# EAGLE board spot_check_rev_3 (EAGLE 9.6.2)
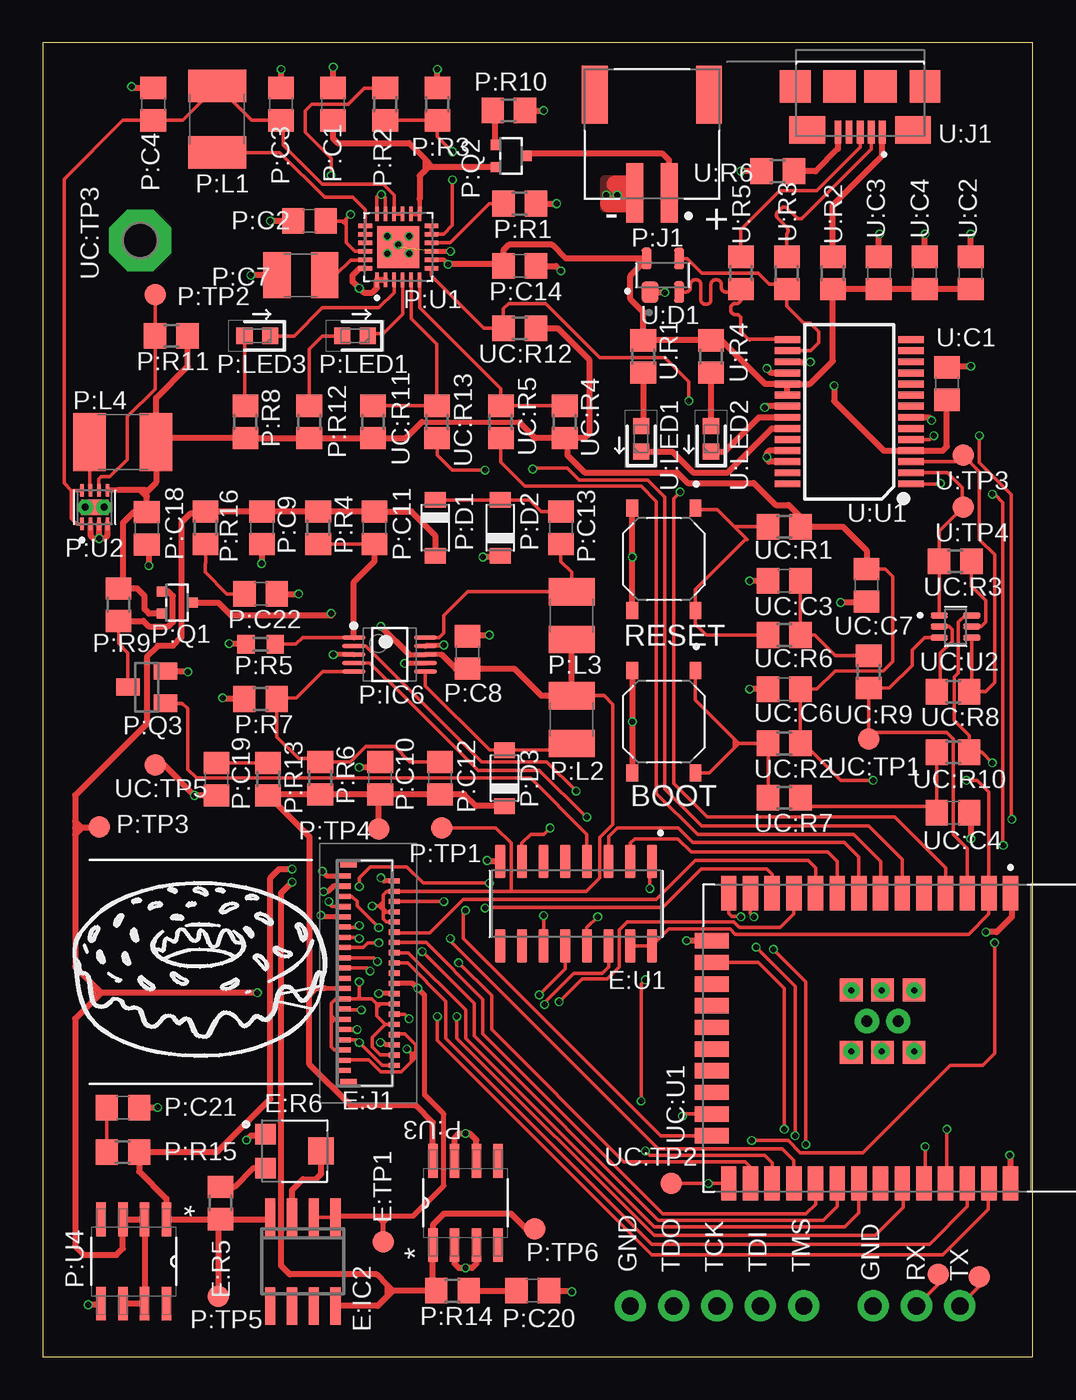
[diagram p0: board, top side]
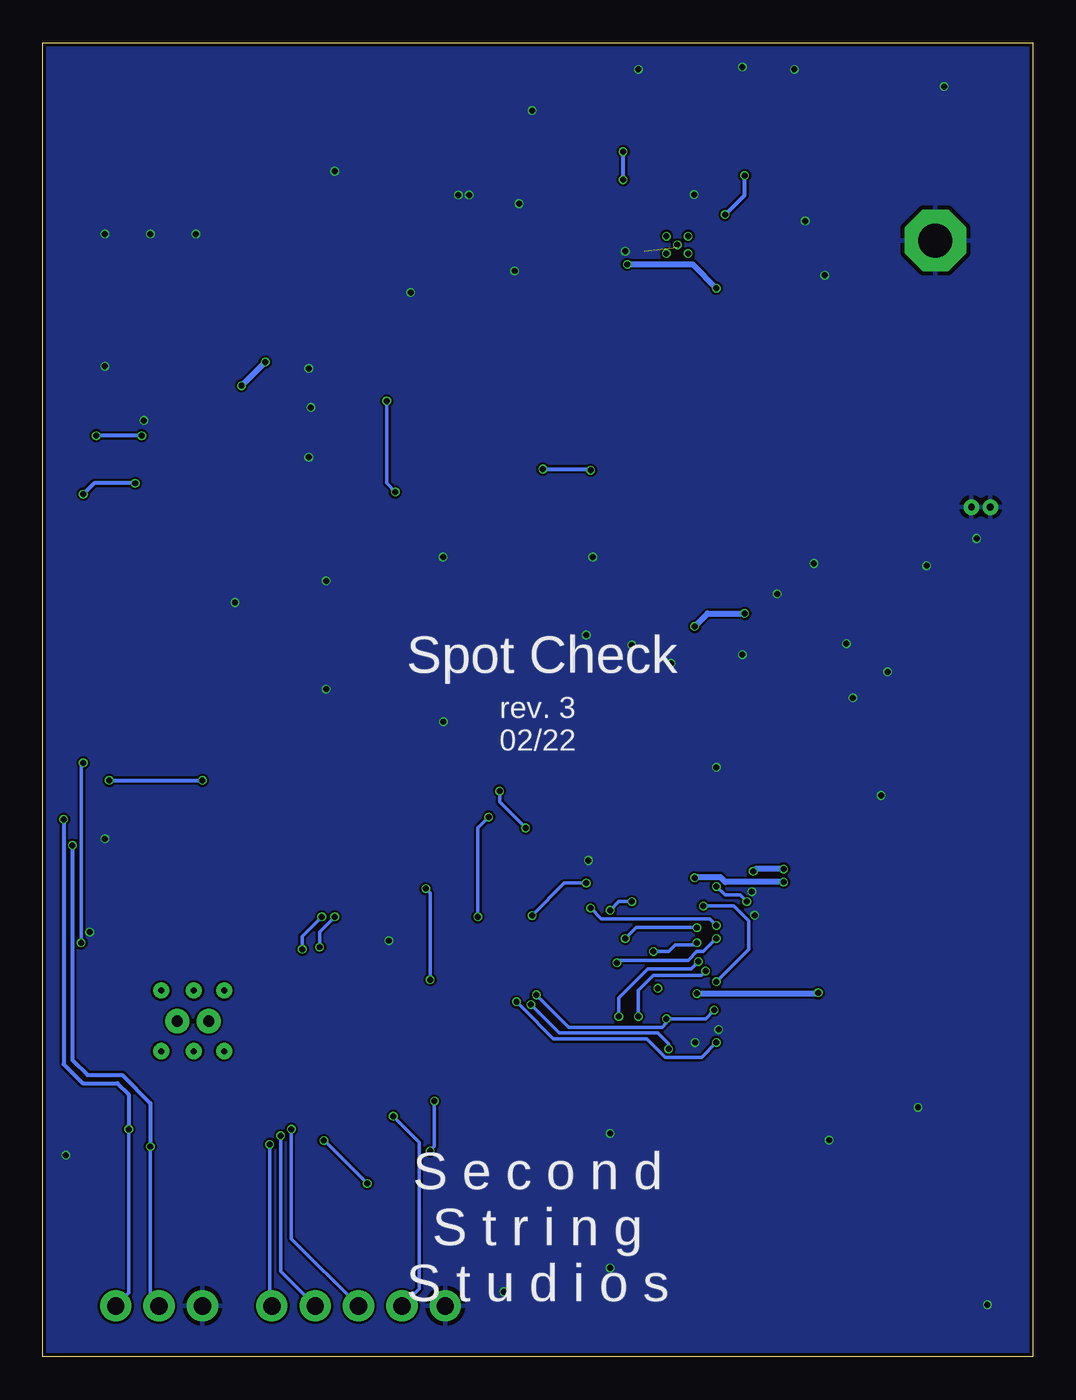
[diagram p1: board, bottom side, seen from below]

Size 58 x 77 mm. Coordinates in mm from the lower left corner, seen from the top.
Outline: 0,0 58,0 58,77 0,77 0,0
Copper layers (1*16): Top 0.035mm / dielectric 1.6mm / Bottom 0.035mm
Design rules "jlcpcb-2layers": minimum track width 5mil, minimum drill 0.3mm, track to track 5mil, track to pad 5mil, pad to pad 5mil, via to via 5mil, smd to smd 5mil, copper to edge 0.2mm, drill to drill 6mil, minimum pad ring 10mil, minimum via ring 3mil, stop-mask expansion 4mil, vias tented up to drill 0mil, thermal gap 10mil

## Footprints (pad centres in the part's own frame; a part is rotated, then mirrored left to right if it is on the bottom)
SO08 = smd 0.6 x 2.2: 1 -1.905,-2.6; 2 -0.635,-2.6; 3 0.635,-2.6; 4 1.905,-2.6; 5 1.905,2.6; 6 0.635,2.6; 7 -0.635,2.6; 8 -1.905,2.6
FH26W39S03SHW05 = smd 0.3 x 0.8: 1 -5.7,-1.288; 3 -5.1,-1.288; 5 -4.5,-1.288; 7 -3.9,-1.288; 9 -3.3,-1.288; 11 -2.7,-1.288; 13 -2.1,-1.288; 15 -1.5,-1.288; 17 -0.9,-1.288; 19 -0.3,-1.288; 21 0.3,-1.288; 23 0.9,-1.288; 25 1.5,-1.288; 27 2.1,-1.288; 29 2.7,-1.288; 31 3.3,-1.288; 33 3.9,-1.288; 35 4.5,-1.288; 37 5.1,-1.288; 39 5.7,-1.288 | smd 0.3 x 0.65: 2 -5.4,1.663; 4 -4.8,1.663; 6 -4.2,1.663; 8 -3.6,1.663; 10 -3,1.663; 12 -2.4,1.663; 14 -1.8,1.663; 16 -1.2,1.663; 18 -0.6,1.663; 20 0,1.663; 22 0.6,1.663; 24 1.2,1.663; 26 1.8,1.663; 28 2.4,1.663; 30 3,1.663; 32 3.6,1.663; 34 4.2,1.663; 36 4.8,1.663; 38 5.4,1.663 | smd 0.4 x 0.95: MP1 -6.4,-1.013; MP2 6.4,-1.013
R0805 = smd 1.3 x 1.5: 1 -0.95,0; 2 0.95,0
TRIM_TC33X-2-333E = smd 1.2 x 1.2: 1 -1.8,1; 3 -1.8,-1 | smd 1.5 x 1.6: 2 1.45,0
B1,27 = smd 1.27 x 1.27: TP 0,0
SOIC127P600X175-16N = smd 1.97 x 0.6: 1 -2.475,4.445; 2 -2.475,3.175; 3 -2.475,1.905; 4 -2.475,0.635; 5 -2.475,-0.635; 6 -2.475,-1.905; 7 -2.475,-3.175; 8 -2.475,-4.445; 9 2.475,-4.445; 10 2.475,-3.175; 11 2.475,-1.905; 12 2.475,-0.635; 13 2.475,0.635; 14 2.475,1.905; 15 2.475,3.175; 16 2.475,4.445
C0805 = smd 1.3 x 1.5: 1 -0.95,0; 2 0.95,0
C1210 = smd 1.6 x 2.7: 1 -1.4,0; 2 1.4,0
SOD3716X135N = smd 0.91 x 1.22: A 1.635,0; C -1.635,0
LINEAR_TECHNOLOGY_LT1945EMS#PBF_0 = smd 1.35 x 0.25: 1 -2.1,1; 2 -2.1,0.5; 3 -2.1,0; 4 -2.1,-0.5; 5 -2.1,-1; 6 2.1,-1; 7 2.1,-0.5; 8 2.1,0; 9 2.1,0.5; 10 2.1,1
JST_S2B-PH-SM4-TB(LF)(SN) = smd 1 x 3.5: 1 -1,0; 2 1,0 | smd 1.5 x 3.4: S1 -3.35,-5.75; S2 3.35,-5.75
L1812 = smd 1.9 x 3.4: 1 -1.95,0; 2 1.95,0
LEDC1608X80N = smd 0.95 x 0.95: 1 -0.75,0; 2 0.75,0
SOT323 = smd 0.6 x 0.55: 1 -0.65,-0.925; 2 0.65,-0.925; 3 0,0.925
SOT23 = smd 1 x 1.4: 1 -0.95,-1.1; 2 0.95,-1.1; 3 0,1.1
R0603 = smd 1 x 1.1: 1 -0.85,0; 2 0.85,0
QFN50P400X400X100-25N = smd 0.86 x 0.27: 1 -1.935,1.25; 2 -1.935,0.75; 3 -1.935,0.25; 4 -1.935,-0.25; 5 -1.935,-0.75; 6 -1.935,-1.25; 13 1.935,-1.25; 14 1.935,-0.75; 15 1.935,-0.25; 16 1.935,0.25; 17 1.935,0.75; 18 1.935,1.25 | smd 0.27 x 0.86: 7 -1.25,-1.935; 8 -0.75,-1.935; 9 -0.25,-1.935; 10 0.25,-1.935; 11 0.75,-1.935; 12 1.25,-1.935; 19 1.25,1.935; 20 0.75,1.935; 21 0.25,1.935; 22 -0.25,1.935; 23 -0.75,1.935; 24 -1.25,1.935 | smd 2.45 x 2.45: 25 0,0
SON50P200X200X80-9N = smd 0.74 x 0.28: 1 -0.985,0.75; 2 -0.985,0.25; 3 -0.985,-0.25; 4 -0.985,-0.75; 5 0.985,-0.75; 6 0.985,-0.25; 7 0.985,0.25; 8 0.985,0.75 | smd 0.9 x 1.6: 9 0,0 | drill 0.4 pad 0.61: 9_1 0,0.55; 9_2 0,-0.55
SOIC127P600X175-8N = smd 1.981 x 0.559: 1 -2.464,1.905; 2 -2.464,0.635; 3 -2.464,-0.635; 4 -2.464,-1.905; 5 2.464,-1.905; 6 2.464,-0.635; 7 2.464,0.635; 8 2.464,1.905
SOT143 = smd 0.99 x 1.26: 1 -0.75,-0.98 | smd 0.59 x 1.26: 2 0.95,-0.98; 3 0.95,0.98; 4 -0.95,0.98
AMPHENOL_10118192-0002LF = smd 0.4 x 1.35: 1 -1.3,0; 2 -0.65,0; 3 0,0; 4 0.65,0; 5 1.3,0 | smd 2.1 x 1.6: S1 -3.1,-0.125; S2 3.1,-0.125 | smd 1.8 x 1.9: S3 -3.8,-2.675; S6 3.8,-2.675 | smd 1.9 x 1.9: S4 -1.2,-2.675; S5 1.2,-2.675
SSOP28-0.65-10.2X5.2MM = smd 0.4 x 1.5: 1 -4.225,-3.625; 2 -3.575,-3.625; 3 -2.925,-3.625; 4 -2.275,-3.625; 5 -1.625,-3.625; 6 -0.975,-3.625; 7 -0.325,-3.625; 8 0.325,-3.625; 9 0.975,-3.625; 10 1.625,-3.625; 11 2.275,-3.625; 12 2.925,-3.625; 13 3.575,-3.625; 14 4.225,-3.625; 15 4.225,3.625; 16 3.575,3.625; 17 2.925,3.625; 18 2.275,3.625; 19 1.625,3.625; 20 0.975,3.625; 21 0.325,3.625; 22 -0.325,3.625; 23 -0.975,3.625; 24 -1.625,3.625; 25 -2.275,3.625; 26 -2.925,3.625; 27 -3.575,3.625; 28 -4.225,3.625
JST-XH-05-PACKAGE-ROUND-PAD = drill 1.016: 1 -5.08,0; 2 -2.54,0; 3 0,0; 4 2.54,0; 5 5.08,0
SW_PTS526_SM08_SMTR2_LFS = smd 1 x 0.7: 1 -3,1.85; 2 3,1.85; 3 -3,-1.85; 4 3,-1.85
P1-20 = drill 2.007 pad 3.15 octagon: TP 0,0
MODULE_ESP32-WROOM-32E_(16MB) = smd 2 x 0.9: 1 -8.5,5.26; 2 -8.5,3.99; 3 -8.5,2.72; 4 -8.5,1.45; 5 -8.5,0.18; 6 -8.5,-1.09; 7 -8.5,-2.36; 8 -8.5,-3.63; 9 -8.5,-4.9; 10 -8.5,-6.17; 11 -8.5,-7.44; 12 -8.5,-8.71; 13 -8.5,-9.98; 14 -8.5,-11.25; 25 8.5,-11.25; 26 8.5,-9.98; 27 8.5,-8.71; 28 8.5,-7.44; 29 8.5,-6.17; 30 8.5,-4.9; 31 8.5,-3.63; 32 8.5,-2.36; 33 8.5,-1.09; 34 8.5,0.18; 35 8.5,1.45; 36 8.5,2.72; 37 8.5,3.99; 38 8.5,5.26 | smd 0.9 x 2: 15 -5.715,-12.25; 16 -4.445,-12.25; 17 -3.175,-12.25; 18 -1.905,-12.25; 19 -0.635,-12.25; 20 0.635,-12.25; 21 1.905,-12.25; 22 3.175,-12.25; 23 4.445,-12.25; 24 5.715,-12.25 | smd 1.33 x 1.33: 39_1 -2.835,-0.405; 39_3 0.835,-0.405; 39_4 -2.835,-2.24; 39_6 0.835,-2.24; 39_7 -2.835,-4.075; 39_9 0.835,-4.075 | drill 0.65 pad 1.422: 39_13 -1,-1.323; 39_18 -1,-3.158
SOT65P210X110-6N = smd 1.02 x 0.36: 1 -0.955,0.65; 2 -0.955,0; 3 -0.955,-0.65; 4 0.955,-0.65; 5 0.955,0; 6 0.955,0.65
JST-XH-03-PACKAGE-ROUND-PAD = drill 1.016: 1 -2.54,0; 2 0,0; 3 2.54,0

## Placement (x,y rotation side)
E:IC2  LM358DR  [SO08]  15.24,5.59 180 top
E:J1  FH26W-39S-0.3SHW_05_  [FH26W39S03SHW05]  18.92,22.48 270 top
E:R5  20k  [R0805]  10.41,9.02 90 top
E:R6  10k  [TRIM_TC33X-2-333E]  14.86,12.06 0 top
E:TP1  TPB1,27  [B1,27]  19.94,6.73 0 top
E:U1  CD74HC4094M  [SOIC127P600X175-16N]  31.24,26.54 270 top
P:C1  10uF  [C0805]  17.01,73.39 90 top
P:C2  4.7uF  [C0805]  15.62,66.55 180 top
P:C3  10uF  [C0805]  13.96,73.39 90 top
P:C4  10uF  [C0805]  6.48,73.39 90 top
P:C7  6.8uF  [C1210]  15.12,63.37 180 top
P:C8  4.7uF  [C0805]  24.89,41.27 90 top
P:C9  1uF  [C0805]  12.84,48.58 270 top
P:C10  1uF  [C0805]  19.77,33.91 270 top
P:C11  100pF  [C0805]  19.44,48.58 270 top
P:C12  4.7pF  [C0805]  23.28,33.91 270 top
P:C13  0.1uF  [C0805]  30.35,48.58 90 top
P:C14  1uF  [C0805]  27.94,63.91 0 top
P:C18  22uF  [C0805]  6.1,48.55 270 top
P:C19  0.33uF  [C0805]  10.19,33.85 270 top
P:C20  0.1uF  [C0805]  28.7,3.87 0 top
P:C21  0.1uF  [C0805]  4.7,14.61 0 top
P:C22  0.33uF  [C0805]  12.77,44.7 0 top
P:D1  MBR0520LT1G  [SOD3716X135N]  22.99,48.58 270 top
P:D2  MBR0520LT1G  [SOD3716X135N]  26.8,48.58 90 top
P:D3  MBR0520LT1G  [SOD3716X135N]  27.05,33.91 90 top
P:IC6  LINEAR_TECHNOLOGY_LT1945EMS#PBFLINEAR_TECHNOLOGY_LT1945EMS#PBF_0_0  [LINEAR_TECHNOLOGY_LT1945EMS#PBF_0]  20.32,41.15 0 top
P:J1  S2B-PH-SM4-TB(LF)(SN)  [JST_S2B-PH-SM4-TB(LF)(SN)]  35.69,68.2 180 top
P:L1  2.2uH  [L1812]  10.22,72.52 90 top
P:L2  22uH  [C1210]  30.99,37.34 270 top
P:L3  22uH  [C1210]  30.99,43.43 90 top
P:L4  1uH  [L1812]  4.7,53.59 0 top
P:LED1  150060RS55040  [LEDC1608X80N]  18.29,59.82 180 top
P:LED3  150060GS55040  [LEDC1608X80N]  12.57,59.82 180 top
P:Q1  SSM3J132TU,LF  [SOT323]  7.87,44.2 270 top
P:Q2  SSM3J132TU,LF  [SOT323]  27.43,70.36 270 top
P:Q3  MMBT3904,215  [SOT23]  6.1,39.24 90 top
P:R1  470  [R0805]  27.94,67.56 180 top
P:R2  330k  [R0805]  20.06,73.39 90 top
P:R3  330k  [R0805]  23.11,73.39 270 top
P:R4  397k  [R0805]  16.14,48.58 90 top
P:R5  27.1k  [R0603]  12.76,41.75 0 top
P:R6  1M  [R0805]  16.26,33.91 90 top
P:R7  59k  [R0805]  12.76,38.54 180 top
P:R8  1k  [R0805]  11.87,54.78 270 top
P:R9  20k  [R0805]  4.45,44.07 90 top
P:R10  1k  [R0805]  27.3,73.03 180 top
P:R11  178k  [R0805]  7.53,59.82 0 top
P:R12  620  [R0805]  15.61,54.78 270 top
P:R13  22  [R0805]  13.21,33.85 270 top
P:R14  22  [R0805]  24,3.87 180 top
P:R15  22  [R0805]  4.7,12 0 top
P:R16  22  [R0805]  9.54,48.58 90 top
P:TP1  TPB1,27  [B1,27]  23.37,30.99 0 top
P:TP2  TPB1,27  [B1,27]  6.6,62.23 0 top
P:TP3  TPB1,27  [B1,27]  3.3,31.05 0 top
P:TP4  TPB1,27  [B1,27]  19.68,30.92 0 top
P:TP5  TPB1,27  [B1,27]  10.29,3.56 0 top
P:TP6  TPB1,27  [B1,27]  28.83,7.49 0 top
P:U1  BQ24196RGER  [QFN50P400X400X100-25N]  20.83,65.02 90 top
P:U2  TPS62082DSGR  [SON50P200X200X80-9N]  3.05,49.78 90 top
P:U3  MC78L15ACDR2G  [SOIC127P600X175-8N]  24.76,9.02 90 top
P:U4  MC79L15ACDR2G  [SOIC127P600X175-8N]  5.33,5.59 270 top
U:C1  100nF  [C0805]  52.96,57.02 90 top
U:C2  4.7uF  [C0805]  54.36,63.5 90 top
U:C3  10nF  [C0805]  48.97,63.5 90 top
U:C4  100nF  [C0805]  51.66,63.5 90 top
U:D1  DRTR5V0U2SR-7  [SOT143]  36.32,63.37 0 top
U:J1  10118192-0002LF  [AMPHENOL_10118192-0002LF]  47.88,71.75 180 top
U:LED1  150060YS55040  [LEDC1608X80N]  35.05,53.78 90 top
U:LED2  150060BS55040  [LEDC1608X80N]  39.15,53.78 90 top
U:R1  270  [R0805]  35.18,58.61 90 top
U:R2  0  [R0805]  46.28,63.5 270 top
U:R3  0  [R0805]  43.59,63.5 270 top
U:R4  330  [R0805]  39.15,58.61 90 top
U:R5  0  [R0805]  40.89,63.5 270 top
U:R6  0  [R0805]  43.05,69.47 180 top
U:TP1  TPB1,27  [B1,27]  52.45,4.83 0 top
U:TP2  TPB1,27  [B1,27]  54.86,4.7 0 top
U:TP3  TPB1,27  [B1,27]  53.91,52.83 0 top
U:TP4  TPB1,27  [B1,27]  53.91,49.78 0 top
U:U1  INTERFACE-FT232RL(SSOP28)  [SSOP28-0.65-10.2X5.2MM]  47.24,55.37 90 top
UC:C3  .01uF  [C0805]  43.43,45.47 180 top
UC:C4  .01uF  [C0805]  53.32,31.88 0 top
UC:C6  22uF  [C0805]  43.43,39.12 180 top
UC:C7  1uF  [C0805]  48.26,45.21 270 top
UC:JTAG  JST-XH-05-PIN-ROUND-PAD  [JST-XH-05-PACKAGE-ROUND-PAD]  39.5,2.98 180 top
UC:R1  12k  [R0805]  43.43,48.64 0 top
UC:R2  12k  [R0805]  43.43,35.94 0 top
UC:R3  10k  [R0805]  53.45,46.61 180 top
UC:R4  4.7k  [R0805]  30.58,54.78 90 top
UC:R5  0  [R0805]  26.83,54.78 270 top
UC:R6  330k  [R0805]  43.43,42.29 0 top
UC:R7  330k  [R0805]  43.43,32.77 0 top
UC:R8  10k  [R0805]  53.32,38.98 0 top
UC:R9  0  [R0805]  48.39,40.13 270 top
UC:R10  0  [R0805]  53.32,35.43 0 top
UC:R11  4.7k  [R0805]  19.35,54.78 90 top
UC:R12  4.7k  [R0805]  27.94,60.26 180 top
UC:R13  0  [R0805]  23.09,54.78 270 top
UC:S1  PTS526_SM08_SMTR2_LFS  [SW_PTS526_SM08_SMTR2_LFS]  36.39,46.74 270 top
UC:S2  PTS526_SM08_SMTR2_LFS  [SW_PTS526_SM08_SMTR2_LFS]  36.39,37.21 270 top
UC:TP1  TPB1,27  [B1,27]  48.39,36.2 0 top
UC:TP2  TPB1,27  [B1,27]  36.83,10.16 0 top
UC:TP3  TPPAD1-20  [P1-20]  5.71,65.41 0 top
UC:TP5  TPB1,27  [B1,27]  6.6,34.67 0 top
UC:U1  ESP32-WROOM-32E_(16MB)  [MODULE_ESP32-WROOM-32E_(16MB)]  51.44,18.67 270 top
UC:U2  BC848CDW1T1G  [SOT65P210X110-6N]  53.47,42.79 0 top
UC:X1  JST-XH-03-PIN-ROUND-PAD  [JST-XH-03-PACKAGE-ROUND-PAD]  51.18,2.98 180 top

## Library data of the parts
E:IC2 = linear
E:J1 = FH26W-39S-0.3SHW_05_; DESCRIPTION: FFC & FPC Connectors 39P SMT HORIZ ZIF 1MM HGHT .3MM PITCH; HEIGHT: 1mm; MANUFACTURER_NAME: Hirose; MANUFACTURER_PART_NUMBER: FH26W-39S-0.3SHW(05); MOUSER_PART_NUMBER: 798-FH26W39S03SHW05; MOUSER_PRICE-STOCK: https://www.mouser.co.uk/ProductDetail/Hirose-Connector/FH26W-39S-03SHW05?qs=vnk2wBG9e14RpudjtVAEhA%3D%3D
E:R5 P:R1-P:R16 U:R1-U:R6 UC:R1-UC:R13 = rcl; SPICEPREFIX: R
E:R6 = TRIM_TC33X-2-333E
E:TP1 P:TP1-P:TP6 U:TP1-U:TP4 UC:TP1-UC:TP3 UC:TP5 = testpad
E:U1 = CD74HC4094M; AVAILABILITY: In Stock; DESCRIPTION: High Speed CMOS Logic 8-Stage Shift-and-Store Bus Register with 3-Stage Outputs 16-SOIC -55 to 125; MF: Texas Instruments; MP: CD74HC4094M; PACKAGE: SOIC-16 Texas Instruments; PRICE: None; PURCHASE-URL: https://pricing.snapeda.com/search/part/CD74HC4094M/?ref=eda
P:C1-P:C4 P:C7-P:C14 P:C18-P:C22 U:C1-U:C4 UC:C3 UC:C4 UC:C6 UC:C7 = rcl; SPICEPREFIX: C
P:D1-P:D3 = MBR0520LT1G; AVAILABILITY: In Stock; DESCRIPTION: Diode Schottky 20V 500mA Surface Mount SOD-123; MF: ON Semiconductor; MP: MBR0520LT1G; PACKAGE: SOD-123-2 ON Semiconductor; PRICE: None; PURCHASE-URL: https://pricing.snapeda.com/search/part/MBR0520LT1G/?ref=eda
P:IC6 = LT1945EMS#PBF; CIIVA_IDS: 1482624; COMPONENT_LINK_1_DESCRIPTION: Manufacturer URL; COMPONENT_LINK_1_URL: http://www.linear.com/; COMPONENT_LINK_3_DESCRIPTION: Package Specification; COMPONENT_LINK_3_URL: http://cds.linear.com/docs/en/packaging/05081661_F_MS.pdf; DATASHEET: http://cds.linear.com/docs/en/datasheet/1945fa.pdf; DATASHEET_VERSION: Rev. A; FOOTPRINT_VARIANT_NAME_0: Level C; FOOTPRINT_VARIANT_NAME_1: Level B; FOOTPRINT_VARIANT_NAME_2: Level A; IMPORTED: yes; IMPORTED_FROM: vault; IMPORT_TS: 1521842479; MF: Linear Technology; MOUNTING_TECHNOLOGY: Surface Mount; MPN: LT1945EMS#PBF; NUMBER_OF_OUTPUTS: 2; PACKAGE: MS-10; PACKAGE_DESCRIPTION: 10-Pin Plastic MSOP, Body 3 x 3 mm, Pitch 0.5 mm; PACKAGE_VERSION: Rev. E, 06/2010; PREFIX: U; RELEASE_DATE: 1377814922; ROHS: Yes; VAULT_GUID: B0F6C986-74D1-4265-A3D3-2E2E10FD489A; VAULT_REVISION: 624277BD-F6E2-44C2-9180-A8188AE27574; VIN_MAXV: 15; VIN_MINV: 1.2
P:J1 = JST-S2B-PH-SM4-TB_LF__SN_; AVAILABILITY: In Stock; DESCRIPTION: Connector Header Surface Mount, Right Angle 2 position 0.079 (2.00mm); MF: JST Sales; MP: S2B-PH-SM4-TB(LF)(SN); PACKAGE: None; PRICE: None
P:L1 P:L4 = rcl; SPICEPREFIX: L
P:L2 P:L3 = custom_rcl
P:LED1 P:LED3 U:LED1 U:LED2 = 150060VS75000; AVAILABILITY: In Stock; DESCRIPTION: Green 570nm LED Indication - Discrete 2V 0603 (1608 Metric); MF: Wurth Elektronik; MP: 150060VS75000; PACKAGE: None; PRICE: None
P:Q1 P:Q2 = SSM3J132TU
P:Q3 = transistor-npn
P:U1 = BQ24196RGER; AVAILABILITY: In Stock; DESCRIPTION: I2C controlled 2.5A single cell USB/Adaptor charger w/ Narrow VDC Power Path 24-VQFN -40 to 85; MF: Texas Instruments; MP: BQ24196RGER; PACKAGE: VQFN-24 Texas Instruments; PRICE: None; PURCHASE-URL: https://pricing.snapeda.com/search/part/BQ24196RGER/?ref=eda
P:U2 = TPS62082DSGR; AVAILABILITY: In Stock; DESCRIPTION: 1.2A High Efficient Step Down Converter in 2x2mm SON Package. 3.3 Vout (Min) 8-WSON -40 to 125; MF: Texas Instruments; MP: TPS62082DSGR; PACKAGE: WSON-8 Texas Instruments; PRICE: None; PURCHASE-URL: https://pricing.snapeda.com/search/part/TPS62082DSGR/?ref=eda
P:U3 = MC78L15ACDR2G; AVAILABILITY: In Stock; DESCRIPTION: Linear Voltage Regulator IC Positive Fixed 1 Output 100mA 8-SOIC; MF: ON Semiconductor; MP: MC78L15ACDR2G; PACKAGE: SOIC-8 ON Semiconductor; PRICE: None; PURCHASE-URL: https://pricing.snapeda.com/search/part/MC78L15ACDR2G/?ref=eda
P:U4 = MC78L15ACDR2G
U:D1 = DRTR5V0U2SR-7; AVAILABILITY: In Stock; DESCRIPTION: ESD Suppressor Diode Diode Array Uni-Dir 5.5V Automotive 4-Pin SOT-143B T/R; MF: NXP Semiconductors; MP: PRTR5V0U2X; PACKAGE: TO-253-4 NXP Semiconductors; PRICE: None; PURCHASE-URL: https://pricing.snapeda.com/search/part/PRTR5V0U2X/?ref=eda
U:J1 = MICRO-USB-10118192-0002LF; AVAILABILITY: In Stock; DESCRIPTION: Micro USB 2.0, Input Output Connectors, B TYPE RECEPTACLE without flange; MF: Amphenol ICC (FCI); MP: 10118192-0002LF; PACKAGE: None; PRICE: None; PURCHASE-URL: https://pricing.snapeda.com/search/part/10118192-0002LF/?ref=eda
U:U1 = FT232RL_SSOP28_; AVAILABILITY: In Stock; DESCRIPTION: USB Bridge, USB to UART USB 2.0 UART Interface 28-SSOP; MF: FTDI, Future; MP: FT232RL; PACKAGE: SSOP-28 FTDI, Future; PRICE: None; PURCHASE-URL: https://pricing.snapeda.com/search/part/FT232RL/?ref=eda
UC:JTAG UC:X1 = Rembrandt Electronics - JST XH Connectors v1-0
UC:S1 UC:S2 = PTS526_SM08_SMTR2_LFS; AVAILABILITY: In Stock; DESCRIPTION: Tactile Switch SPST-NO Top Actuated Surface Mount; MF: C&K; MP: PTS526 SM08 SMTR2 LFS; PACKAGE: None; PRICE: None; PURCHASE-URL: https://pricing.snapeda.com/search/part/PTS526 SM08 SMTR2 LFS/?ref=eda
UC:U1 = ESP32-WROOM-32E__16MB_; AVAILABILITY: Not in stock; DESCRIPTION: Bluetooth, WiFi 802.11b/g/n, Bluetooth v4.2 +EDR, Class 1, 2 and 3 Transceiver Module 2.4GHz ~ 2.5GHz Integrated, Trace Surface Mount; MF: Espressif Systems; MP: ESP32-WROOM-32E (16MB); PACKAGE: Module Espressif Systems; PRICE: None
UC:U2 = BC848CDW1T1G; AVAILABILITY: In Stock; DESCRIPTION: Bipolar (BJT) Transistor Array 2 NPN (Dual) 30V 100mA 100MHz 380mW Surface Mount SC-88/SC70-6/SOT-363; MF: ON Semiconductor; MP: BC848CDW1T1G; PACKAGE: SC-88-6 ON Semiconductor; PRICE: None; PURCHASE-URL: https://pricing.snapeda.com/search/part/BC848CDW1T1G/?ref=eda

## Nets
3V3_CTRL: E:U1.4 P:Q3.1
3V3_CTRLD: E:J1.4 E:J1.8 E:J1.10 E:J1.25 E:J1.26 E:J1.29 E:J1.30 E:J1.35 E:J1.36 P:C8.1 P:IC6.8 P:L2.1 P:L3.1 P:Q1.3 P:TP1.TP
3V3_REG: E:U1.15 E:U1.16 P:C18.1 P:L4.2 P:Q1.2 P:R8.2 P:R9.2 P:R11.2 P:R12.2 P:U2.5 UC:C6.1 UC:C7.1 UC:R1.2 UC:R2.2 UC:R4.1 UC:R11.1 UC:R12.1 UC:U1.2
5V_USB: P:C14.1 P:U1.1 P:U1.2 P:U1.8 P:U1.24 U:C2.1 U:C3.1 U:C4.1 U:D1.4 U:R1.2 U:R2.2 U:R4.2 U:U1.19 U:U1.20
15V: E:IC2.8 E:J1.2 P:R14.2 P:TP6.TP P:U3.1
22V: E:J1.23 P:C10.2 P:C12.2 P:D3.C P:R6.1 P:R13.2 P:TP4.TP P:U3.8
22V_CTRL: E:U1.13 P:IC6.4
-15V: E:IC2.4 E:J1.1 E:R5.1 P:R15.2 P:TP5.TP P:U4.1
-20V: E:J1.24 P:C9.1 P:C11.1 P:D1.A P:R4.2 P:R16.2 P:TP3.TP P:U4.2 P:U4.3 P:U4.6 P:U4.7
-20V_CTRL: E:U1.7 P:IC6.2
BQ_INT: P:U1.7 UC:R12.2 UC:U1.4
BQ_SCL: P:U1.5 UC:R11.2 UC:R13.1
BQ_SDA: P:U1.6 UC:R4.2 UC:R5.1
DISP_CE: E:J1.6 UC:U1.24
DISP_CLK: E:J1.5 UC:U1.28
DISP_CLKV: E:J1.33 E:J1.38 UC:U1.11
DISP_D0: E:J1.12 UC:U1.10
DISP_D1: E:J1.13 UC:U1.26
DISP_D2: E:J1.14 UC:U1.29
DISP_D3: E:J1.15 UC:U1.30
DISP_D4: E:J1.16 UC:U1.31
DISP_D5: E:J1.17 UC:U1.33
DISP_D6: E:J1.18 UC:U1.36
DISP_D7: E:J1.19 UC:U1.37
DISP_SPH: E:J1.11 UC:U1.12
DTR: U:TP4.TP U:U1.2 UC:R3.2 UC:U2.1
E:15V_CTRL: E:U1.5
E:-15V_CTRL: E:U1.6
E:DISP_GMODE: E:J1.27 E:J1.28 E:U1.12
E:DISP_OE: E:J1.7 E:U1.11
E:DISP_SPV: E:J1.32 E:J1.37 E:U1.14
E:DISP_VCOMMON: E:IC2.1 E:IC2.2 E:J1.22 E:TP1.TP
E:N$2: E:R5.2 E:R6.3
E:N$3: E:IC2.3 E:R6.2
ESP_RX: U:TP1.TP U:U1.1 UC:U1.34 UC:X1.2
ESP_TX: U:TP2.TP U:U1.5 UC:U1.35 UC:X1.1
GND: E:J1.3 E:J1.9 E:J1.31 E:J1.34 E:R6.1 E:U1.8 P:C1.2 P:C2.2 P:C3.2 P:C4.2 P:C7.2 P:C8.2 P:C9.2 P:C10.1 P:C14.2 P:C18.2 P:C19.2 P:C20.2 P:C21.2 P:C22.2 P:D2.C P:IC6.3 P:IC6.7 P:IC6.9 P:J1.2 P:Q3.2 P:R1.1 P:R3.1 P:R5.1 P:R7.2 P:R10.1 P:U1.9 P:U1.17 P:U1.18 P:U1.25 P:U2.2 P:U2.3 P:U2.4 P:U2.9 P:U2.9_1 P:U2.9_2 P:U3.2 P:U3.3 P:U3.6 P:U3.7 P:U4.5 U:C1.2 U:C2.2 U:C3.2 U:C4.2 U:D1.1 U:R6.2 U:U1.7 U:U1.18 U:U1.21 U:U1.25 U:U1.26 UC:C3.2 UC:C4.2 UC:C6.2 UC:C7.2 UC:JTAG.5 UC:S1.3 UC:S1.4 UC:S2.3 UC:S2.4 UC:TP3.TP UC:TP5.TP UC:U1.1 UC:U1.15 UC:U1.38 UC:X1.3
P:3V3_PG: P:R11.1 P:TP2.TP P:U2.6
P:BQ_PG: P:LED3.1 P:U1.3
P:BQ_REGN: P:C2.1 P:R2.2 P:U1.22
P:BQ_STAT: P:LED1.1 P:U1.4
P:N$1: P:C1.1 P:Q2.2 P:U1.13 P:U1.14
P:N$2: P:R2.1 P:R3.2 P:U1.11 P:U1.12
P:N$3: P:L1.1 P:U1.19 P:U1.20 P:U1.21
P:N$4: P:J1.1 P:Q2.3
P:N$5: P:C7.1 P:U1.23
P:N$6: P:R1.2 P:U1.10
P:N$7: P:LED3.2 P:R8.1
P:N$8: P:C3.1 P:C4.1 P:L1.2 P:U1.15 P:U1.16 P:U2.1 P:U2.8
P:N$9: P:Q2.1 P:R10.2
P:N$10: P:C12.1 P:IC6.5 P:R6.2 P:R7.1
P:N$11: P:L4.1 P:U2.7
P:N$12: P:LED1.2 P:R12.1
P:N$13: P:D3.A P:IC6.6 P:L2.2
P:N$14: P:C13.2 P:D1.C P:D2.A
P:N$15: P:Q1.1 P:Q3.3 P:R9.1
P:N$16: P:C13.1 P:IC6.10 P:L3.2
P:N$17: P:C11.2 P:IC6.1 P:R4.1 P:R5.2
P:N$19: P:C22.1 P:R16.1
P:N$20: P:C21.1 P:R15.1
P:N$21: P:C20.1 P:R14.1
P:N$22: P:C19.1 P:R13.1
RTS: U:TP3.TP U:U1.3 UC:R8.2 UC:U2.4
SHR_CLK: E:U1.3 UC:U1.8
SHR_DATA: E:U1.2 UC:U1.9
SHR_STR: E:U1.1 UC:U1.27
U:FT232_RX_IND: U:LED2.1 U:U1.22
U:FT232_TX_IND: U:LED1.1 U:U1.23
U:N$1: U:LED1.2 U:R1.1
U:N$2: U:LED2.2 U:R4.1
U:N$3: U:J1.1 U:R2.1
U:N$4: U:C1.1 U:U1.4 U:U1.17
U:N$7: U:J1.5 U:R6.1
U:USBD1_N: U:J1.2 U:R3.1
U:USBD1_P: U:J1.3 U:R5.1
U:USBD2_N: U:D1.3 U:R3.2 U:U1.16
U:USBD2_P: U:D1.2 U:R5.2 U:U1.15
UC:ESP_EN: UC:R9.2 UC:TP1.TP UC:U1.3 UC:U2.3
UC:ESP_IO0: UC:R10.2 UC:TP2.TP UC:U1.25 UC:U2.6
UC:ESP_TCK: UC:JTAG.3 UC:U1.16
UC:ESP_TDI: UC:JTAG.2 UC:U1.14
UC:ESP_TDO: UC:JTAG.4 UC:U1.23
UC:ESP_TMS: UC:JTAG.1 UC:U1.13
UC:N$1: UC:R3.1 UC:U2.5
UC:N$2: UC:R13.2 UC:U1.6
UC:N$3: UC:R5.2 UC:U1.7
UC:N$4: UC:R8.1 UC:U2.2
UC:N$5: UC:R1.1 UC:R6.1 UC:S1.1 UC:S1.2
UC:N$6: UC:R2.1 UC:R7.1 UC:S2.1 UC:S2.2
UC:N$7: UC:C4.1 UC:R7.2 UC:R10.1
UC:N$9: UC:C3.1 UC:R6.2 UC:R9.1

## Tracks (layer width: path | path; a pad name or v marks a point on that pad's centre or on a via)
3V3_CTRL
  Top 0.203: E:U1.4 31.88,30.61 28.57,33.91 9.02,33.91 8.51,34.42 8.51,37.97 8.19,38.29 P:Q3.1
3V3_CTRLD  (via drill 0.35)
  Top 0.203: P:L2.1 32.89,38.74 33.4,38.23 33.4,31.2 32.62,30.42 32.62,28.05 31.85,27.28 27.43,27.28 | 27.43,27.28 E:J1.4 20.17,27.28 19.94,27.05 19.94,26.67 | E:J1.36 19.79,17.68 19.3,18.16 19.3,18.72 20.07,19.48 | E:J1.30 20.07,19.48 | 18.67,20.98 19.28,20.98 19.58,20.68 | 18.67,20.98 18.41,20.98 | 18.41,20.98 E:J1.25 17.61,20.95 17.14,20.95 16.89,20.7 16.89,20 | 17.11,19.78 16.89,19.56 | 17.11,19.78 E:J1.29 | 16.89,20 17.11,19.78 | E:J1.10 20.11,25.48 19.94,25.65 19.94,25.91 | 19.94,25.91 19.94,26.04 | 19.94,26.04 19.94,26.29 | 19.94,26.29 19.94,26.42 | 19.94,26.42 19.94,26.67 | P:TP1.TP 26.54,30.99 27.43,30.1 27.43,27.28 | E:J1.8 20.15,26.08 | 20.11,26.08 19.98,26.08 19.94,26.04 | 20.15,26.08 20.07,26.16 | 20.07,26.16 19.94,26.29 | 20.15,26.08 20.11,26.08 | 20.11,26.08 19.94,25.91 | 16.89,19.56 16.89,20 | E:J1.35 17.07,17.98 16.89,18.16 16.89,19.56 | 18.67,20.98 18.54,21.11 | 18.54,21.11 v18.54,21.97 | v19.3,26.42 19.68,26.42 | 19.68,26.42 19.94,26.42 | 19.68,26.42 19.94,26.67 | 20.07,26.16 19.94,26.16 19.68,26.42 | 18.41,20.98 18.54,21.11 | E:J1.26 19.79,20.68 | 19.79,20.68 19.58,20.68 | 20.07,19.48 19.56,19.99 19.56,20.45 | 19.79,20.68 19.56,20.45 | 19.56,20.45 19.56,20.66 19.58,20.68
  Top 0.305: 21.46,41.15 P:IC6.8 23.37,41.15
  Top 0.36: v16.89,43.56 17.02,43.56 16.89,43.43 11.05,43.43 10.29,44.2 P:Q1.3 | v19.81,42.8 21.46,41.15 | 23.37,41.15 24.19,40.33 P:C8.1 27.62,40.33 29.21,38.74 P:L2.1 P:L3.1
  Bottom 0.203: v19.3,26.42 17.53,26.42 16.64,25.53 16.64,23.88 v18.54,21.97
  Bottom 0.36: v16.89,43.56 19.05,43.56 v19.81,42.8
3V3_REG  (via drill 0.35)
  Top 0.203: UC:C7.1 49.34,46.16 49.78,45.72 49.78,40.74 49.24,40.19 46.41,40.19 45.34,39.12 UC:C6.1 44.38,36.01 44.45,35.94 | v54.1,33.78 54.74,33.78 55.42,33.09 UC:U1.2 55.42,25.96 54.23,24.77 40.58,24.77 40.28,25.06 36.68,25.06 E:U1.16 E:U1.15 | v48.64,33.78 46.74,33.78 44.58,35.94 44.45,35.94 | 44.45,35.94 UC:R2.2
  Top 0.305: 22.21,54.77 27.9,54.77 27.94,54.74 | 4.45,50.8 3.83,50.8 P:U2.5
  Top 0.36: 22.21,54.77 21.26,53.83 UC:R11.1 P:R12.2 P:R8.2 6.88,53.83 P:L4.2 | P:L4.2 6.65,56.18 8.51,58.04 8.51,59.79 P:R11.2 | P:Q1.2 6.24,43.55 5.97,43.81 5.97,44.58 5.53,45.02 P:R9.2 4.7,45.27 4.7,48.87 5.33,49.5 P:C18.1 6.1,50.42 | UC:R12.1 30.16,60.26 32,58.42 32,54.1 31.73,53.83 UC:R4.1 | UC:R4.1 28.85,53.83 27.94,54.74 | UC:R4.1 30.73,53.67 30.73,52.83 31.75,51.82 37.16,51.82 37.77,51.2 41.63,51.2 42.93,49.91 43.69,49.91 44.58,49.02 44.58,48.64 | UC:R1.2 44.58,48.64 | 44.58,48.64 46.86,48.64 48.26,47.24 UC:C7.1 | P:L4.2 6.65,51.23 6.22,50.8 | 6.1,50.42 6.1,50.67 | 6.22,50.8 6.1,50.67 | 6.1,50.67 5.97,50.8 | 5.97,50.8 5.71,50.8 | 5.71,50.8 4.45,50.8 | 5.97,50.8 6.22,50.8 | 6.1,50.42 5.71,50.8
  Bottom 0.23: v54.1,33.78 v48.64,33.78
5V_USB  (via drill 0.35)
  Top 0.254: P:U1.8 23.48,64.27 v23.75,64.01
  Top 0.36: 35.01,63.93 35.07,63.99 35.07,64.05 U:D1.4 34.8,64.35 | 35.01,63.93 34.42,63.34 34.42,61.98 35.18,61.21 U:R1.2 U:R4.2 39.75,59.56 42.32,57 U:U1.19 | U:C2.1 U:C4.1 U:C3.1 U:R2.2 46.28,58.34 44.93,57 U:U1.19 | U:U1.20 U:U1.19 | v23.75,64.01 26.89,64.01 P:C14.1 26.99,64.84 27.3,65.15 29.84,65.15 30.64,64.35 34.8,64.35 | P:U1.24 18.56,63.77 18.16,63.37 18.16,62.99 v18.54,62.61 18.8,62.36 19.3,62.36 19.58,62.63 P:U1.1 P:U1.2 | 34.8,64.35 35.01,64.14 35.01,63.93
  Bottom 0.36: v23.75,64.01 19.94,64.01 v18.54,62.61
15V  (via drill 0.35)
  Top 0.305: E:J1.2 20,27.88 v19.81,28.07 | 20.19,3.56 20.19,4.19
  Top 0.36: 20.51,3.87 P:R14.2 22.86,4.07 P:U3.1 22.86,7.75 23.5,8.38 27.43,8.38 28.32,7.49 P:TP6.TP | E:IC2.8 19.62,2.99 20.19,3.56 20.51,3.87 | 20.51,3.87 20.19,4.19 19.56,4.83 14.48,4.83 13.97,5.33 13.97,27.18 v14.61,27.81
  Bottom 0.36: v14.61,27.81 18.01,27.81 18.31,28.12 19.76,28.12 v19.81,28.07
22V
  Top 0.254: 16.51,21.59 E:J1.23
  Top 0.36: P:C10.2 P:C12.2 24.7,32.96 25.38,32.27 P:D3.C | P:C10.2 P:R6.1 13.27,32.96 P:R13.2 15.62,30.49 15.62,21.84 | 15.62,21.84 15.62,21.21 | 16.51,21.59 16,21.59 | P:U3.8 22.86,13.72 21.84,14.73 18.03,14.73 15.62,17.14 15.62,21.21 | 15.62,21.21 16,21.59 | 16,21.59 15.88,21.59 15.62,21.84 | P:TP4.TP 19.68,32.88 P:C10.2
22V_CTRL  (via drill 0.35)
  Top 0.203: P:IC6.4 19.17,40.65 20.19,39.62 20.24,39.62 25.5,34.37 29.09,34.37 31.84,31.62 v31.88,31.62 | E:U1.13 31.88,25.15 v32.51,25.78
  Bottom 0.203: v31.88,31.62 32.51,30.99 v32.51,25.78
-15V  (via drill 0.35)
  Top 0.305: E:J1.1 16.65,28.18 v16.38,28.45
  Top 0.36: E:R5.1 7.25,8.07 P:U4.1 7.24,9.27 5.65,10.86 P:R15.2 10.22,12 13.34,15.11 13.34,28.07 13.84,28.57 v14.61,28.57 | E:R5.1 13.21,8.07 E:IC2.4 | E:R5.1 10.29,7.94 P:TP5.TP
  Bottom 0.36: v14.61,28.57 16.26,28.57 v16.38,28.45
-20V  (via drill 0.35)
  Top 0.305: v19.68,21.29 E:J1.24
  Top 0.36: P:D1.A 22.99,48.13 21.59,49.53 P:C11.1 P:R4.2 P:C9.1 P:R16.2 9.42,49.4 8.64,49.4 8.13,48.9 8.13,42.16 7.62,41.66 6.73,41.66 6.1,41.02 6.1,37.08 1.91,32.89 1.91,31.37 | P:U4.6 P:U4.7 P:U4.2 P:U4.3 4.7,6.35 4.32,5.97 2.41,5.97 1.91,6.48 1.91,19.81 2.98,20.89 | 1.91,31.37 1.91,30.99 | 1.91,30.99 1.91,30.61 | 1.91,30.61 1.91,22.86 3.05,21.72 | 3.05,21.72 3.43,21.34 | v12.57,21.34 3.43,21.34 | 3.43,21.34 2.98,20.89 | P:TP3.TP 3.24,30.99 2.29,30.99 | 1.91,30.99 2.29,30.99 | 2.29,30.99 1.91,31.37 | 2.29,30.99 1.91,30.61 | 2.98,20.89 2.98,21.65 3.05,21.72 | v19.68,21.29
  Bottom 0.36: v12.57,21.34 12.62,21.29 v19.68,21.29
-20V_CTRL  (via drill 0.35)
  Top 0.203: v31.24,33.15 29.53,34.86 25.71,34.86 18.92,41.65 P:IC6.2 | v29.72,30.99 29.34,30.61 28.57,30.61 28.07,30.1 E:U1.7
  Bottom 0.203: v31.24,33.15 31.24,32.51 v29.72,30.99
BQ_INT  (via drill 0.35)
  Top 0.203: P:U1.7 22.76,63.34 25.84,60.26 UC:R12.2 26.99,61.41 27.3,61.72 29.46,61.72 32.64,58.55 36.45,58.55 37.85,57.15 v37.85,56.01 | v37.34,50.67 36.96,50.29 36.96,33.59 38.92,31.62 49.91,31.62 52.88,28.65 UC:U1.4
  Bottom 0.203: v37.85,56.01 37.85,51.18 v37.34,50.67
BQ_SCL
  Top 0.203: P:U1.5 21.58,60.84 23.09,59.33 UC:R13.1 UC:R11.2
BQ_SDA
  Top 0.203: P:U1.6 22.08,61.49 26.83,56.73 26.83,55.88 | 26.83,55.88 UC:R5.1 | UC:R4.2 26.99,55.73 26.83,55.88
DISP_CE  (via drill 0.35)
  Top 0.203: UC:U1.24 36.2,12.95 24.64,24.51 24.64,26.04 v24.77,26.16 | v23.5,26.67 E:J1.6
  Bottom 0.203: v23.5,26.67 24.26,26.67 v24.77,26.16
DISP_CLK  (via drill 0.35)
  Top 0.203: v19.68,25.15 18.41,26.42 18.41,26.67 18.11,26.98 E:J1.5 | v23.88,24.51 23.88,24.38 36.07,12.19 43.31,12.19 43.99,11.5 UC:U1.28
  Bottom 0.203: v23.88,24.51 23.24,25.15 v19.68,25.15
DISP_CLKV  (via drill 0.35)
  Top 0.203: E:J1.38 19.88,17.08 v18.54,18.41 18.38,18.58 E:J1.33 | v30.25,20.81 31.59,22.15 33.07,22.15 33.78,22.86 33.78,25.02 34.24,25.47 40.49,25.47 40.77,25.19 40.81,25.19 40.82,25.17 43.21,25.17 43.99,25.96 UC:U1.11
  Bottom 0.203: v30.25,20.81 29.88,20.44 28.09,18.64 22.62,18.64 21.54,17.55 19.4,17.55 v18.54,18.41
DISP_D0
  Top 0.203: E:J1.12 20.64,24.83 22.67,24.83 24.64,26.8 35.94,26.8 38.23,29.08 44.83,29.08 45.27,28.65 UC:U1.10
DISP_D1  (via drill 0.35)
  Top 0.203: UC:U1.26 41.45,11.12 41.15,11.43 34.04,11.43 26.29,19.18 26.29,21.16 v24.36,23.09 | E:J1.13 18.47,24.58 v18.54,24.51
  Bottom 0.203: v18.54,24.51 19.3,23.75 19.68,23.75 20.19,23.24 24.21,23.24 v24.36,23.09
DISP_D2
  Top 0.203: E:J1.14 22.46,24.28 25.78,20.95 25.78,18.92 36.32,8.38 44.7,8.38 45.27,8.94 UC:U1.29
DISP_D3  (via drill 0.35)
  Top 0.203: v22.23,23.75 25.27,20.7 25.27,18.8 36.07,8 45.72,8 46.53,8.82 UC:U1.30 | v19.68,24.26 19.05,24.26 18.77,23.98 E:J1.15
  Bottom 0.203: v19.68,24.26 19.81,24.13 20.95,24.13 21.34,23.75 v22.23,23.75
DISP_D4
  Top 0.203: E:J1.16 21.41,23.68 24.77,20.32 24.77,18.67 35.81,7.62 46.99,7.62 47.8,8.44 UC:U1.31
DISP_D5  (via drill 0.35)
  Top 0.203: E:J1.17 19.38,23.38 v19.6,23.16 | v24.26,19.94 24.26,18.67 35.81,7.11 48.77,7.11 50.09,8.43 50.29,8.64 50.42,8.76 50.42,10.1 UC:U1.33
  Bottom 0.203: v19.6,23.16 20.02,22.73 22.56,22.73 24.26,21.04 v24.26,19.94
DISP_D6
  Top 0.203: E:J1.18 21.37,23.08 23.62,20.83 23.62,18.67 35.69,6.6 51.94,6.6 54.16,8.82 UC:U1.36
DISP_D7  (via drill 0.35)
  Top 0.203: E:J1.19 19,22.78 v19.18,22.61 | v23.11,19.94 23.11,18.54 35.69,5.97 52.7,5.97 55.37,8.64 55.37,10.12 UC:U1.37
  Bottom 0.203: v19.18,22.61 19.43,22.35 22.23,22.35 23.11,21.46 v23.11,19.94
DISP_SPH  (via drill 0.35)
  Top 0.203: UC:U1.12 42.73,28.27 42.42,28.57 38.57,28.57 36.33,26.34 25.96,26.34 v25.91,26.29 | E:J1.11 17.67,25.15 18.41,25.15 v18.54,25.27
  Bottom 0.203: v25.91,26.29 25.27,25.65 18.92,25.65 v18.54,25.27
DTR
  Top 0.203: U:U1.2 52.98,51.8 53.85,50.93 53.85,49.85 U:TP4.TP 52.5,48.37 UC:R3.2 52.51,46.6 UC:U2.1
E:DISP_GMODE  (via drill 0.35)
  Top 0.203: E:U1.12 30.61,22.73 v29.08,21.21 | E:J1.28 21.2,20.08 v21.46,19.81 | v18.67,20.32 17.69,20.32 E:J1.27
  Bottom 0.203: v29.08,21.21 27.18,19.3 21.72,19.3 21.46,19.56 v21.46,19.81 19.18,19.81 v18.67,20.32
E:DISP_OE  (via drill 0.35)
  Top 0.203: v26.16,27.76 22.28,27.76 21.34,28.7 19.18,28.7 18.54,28.07 v18.54,27.56 | v16.76,26.67 16.76,26.54 16.93,26.38 E:J1.7 | E:U1.11 v29.34,25.86
  Bottom 0.203: v29.34,25.86 27.44,27.76 v26.16,27.76 | v18.54,27.56 18.03,27.05 17.14,27.05 v16.76,26.67
E:DISP_SPV  (via drill 0.35)
  Top 0.203: E:J1.37 17.66,17.4 19.09,17.4 19.79,16.7 21.01,16.7 21.58,17.28 | E:J1.32 20.63,18.92 21.21,18.92 21.84,18.29 21.84,17.91 | 21.58,17.28 21.84,17.54 | 21.84,17.91 21.84,17.54 | E:U1.14 33.15,22.86 32.77,22.48 31.11,22.48 29.4,20.77 v29.4,20.64 | v21.34,18.03 21.59,17.78 | 21.59,17.78 21.83,17.54 21.84,17.54 | 21.59,17.78 21.72,17.78 21.84,17.91 | 21.58,17.28 21.58,17.77 21.59,17.78
  Bottom 0.203: v29.4,20.64 27.74,18.97 21.97,18.97 21.34,18.34 v21.34,18.03
E:DISP_VCOMMON  (via drill 0.35)
  Top 0.203: E:IC2.2 E:IC2.1
  Top 0.305: E:J1.22 21.68,21.88 v21.97,21.59 22.35,21.21 22.35,15.37 23.5,14.22 23.5,10.03 21.72,8.26 20.32,8.26 | E:IC2.1 17.21,8.26 19.56,8.26 | 19.56,8.26 19.94,8.26 | 19.94,8.26 20.32,8.26 | E:TP1.TP 19.94,7.87 | 19.94,8.26 19.94,7.87 | 19.56,8.26 19.94,7.87 | 19.94,7.87 20.32,8.26
E:N$2
  Top 0.36: E:R5.2 11.24,9.97 12.34,11.06 E:R6.3
E:N$3
  Top 0.36: E:IC2.3 | E:IC2.3 14.61,9.78 15.24,10.41 16,10.41 16.31,10.72 E:R6.2
ESP_RX  (via drill 0.35)
  Top 0.203: U:U1.1 52.54,51.15 v52.58,51.18 | v55.63,50.55 55.75,50.55 56.24,50.06 56.24,30 v56.26,29.97 | v51.69,12.32 51.69,10.24 UC:U1.34 | U:TP1.TP 52.45,4.25 UC:X1.2
  Bottom 0.203: v51.69,12.32 51.69,3.49 UC:X1.2
  Bottom 0.23: v52.58,51.18 54.99,51.18 v55.63,50.55 | v56.26,29.97 56.26,17.4 55.37,16.51 53.34,16.51 51.69,14.86 v51.69,12.32
ESP_TX  (via drill 0.35)
  Top 0.203: U:U1.5 51.97,53.75 v52.2,53.98 | v54.86,53.98 54.86,52.38 56.72,50.53 56.72,31.54 v56.77,31.5 | v52.96,13.34 52.96,10.24 UC:U1.35 | UC:X1.1 54.86,4.13 U:TP2.TP
  Bottom 0.203: v52.96,13.34 52.96,3.75 UC:X1.1
  Bottom 0.23: v52.2,53.98 v54.86,53.98 | v52.96,13.34 52.96,15.37 53.62,16.03 55.65,16.03 56.77,17.15 v56.77,31.5
GND  (via drill 0.35)  (1 unrouted)
  Top 0.203: P:C7.2 | P:U1.17 20.07,66.97 20.07,67.94 19.88,68.14 | 19.88,68.14 19.81,68.2 19.58,67.97 P:U1.18 | 19.88,68.14 v19.84,68.1
  Top 0.305: E:J1.34 20.07,18.28 19.94,18.42 v19.78,18.42 | E:J1.31 v18.41,19.18 | E:J1.9 16.39,25.78 v16.3,25.87 | E:J1.3 17.04,27.58 16.71,27.25 v16.46,27.25 | P:IC6.3 v17.02,41.15 | P:IC6.9 22.48,41.71 v23.5,41.71 | P:IC6.7 22.4,40.63 v21.2,40.63 | P:U1.9 v23.87,64.77 v23.88,64.78
  Top 0.36: P:C14.2 30.07,63.91 v30.35,63.63 | U:D1.1 36.41,62.39 v36.45,62.36 | U:U1.21 42.36,55.7 v42.29,55.63 | U:U1.18 42.68,57.65 v42.42,57.91 | U:U1.7 51.89,55.05 v52.07,54.86 | U:C2.2 v54.36,65.79 | U:C4.2 51.66,65.76 v51.69,65.79 | U:C3.2 48.97,65.73 v49.02,65.79 | U:C1.2 53.02,58.04 v54.36,58.04 | UC:C7.2 48.19,44.2 v46.74,44.2 | UC:C4.2 54.36,31.8 v54.36,30.35 | UC:U1.1 56.77,27.09 56.77,25.78 55.88,24.89 v55.24,24.89 | UC:U1.38 56.7,11.76 v56.64,11.81 | P:C20.2 30.92,3.87 v30.99,3.81 | P:U3.2 | P:U3.2 24.13,5.46 24.38,5.21 v24.77,5.21 25.15,5.21 25.4,5.46 P:U3.3 | P:U3.3 | P:U3.7 24.13,12.83 24.38,13.08 v24.77,13.08 25.02,13.08 25.4,12.7 P:U3.6 | E:R6.1 12.95,12.95 12.19,12.95 v11.94,12.7 | P:U4.5 3.35,3.05 v2.67,3.05 | P:C21.2 v6.73,14.61 | P:C10.1 19.45,34.54 v18.54,34.54 | P:C19.2 v8.89,32.89 7.11,34.67 UC:TP5.TP | P:Q3.2 8.45,40.19 v8.51,40.13 | P:R7.2 10.6,38.54 v10.54,38.61 | P:R5.1 10.95,41.75 v10.92,41.78 | P:C22.2 v14.99,44.7 | P:C8.2 24.96,42.29 v26.16,42.29 | P:D2.C 26.72,46.86 v25.78,46.86 | P:C18.2 6.22,47.48 v6.22,46.35 | P:U2.2 2.8,48.14 2.79,48.13 2.98,47.94 v3.3,47.94 | v3.3,47.94 3.62,47.94 3.8,48.12 P:U2.4 | P:U2.3 v3.3,47.95 v3.3,47.94 | P:C9.2 12.84,46.5 v12.83,46.48 | UC:S2.3 v34.53,37.21 UC:S2.4 | UC:S1.4 v34.53,46.85 v34.54,46.86 34.54,49.73 UC:S1.3 | UC:C3.2 v41.4,45.47 | U:U1.26 42.55,52.45 42.42,52.58 v42.42,52.7 42.42,52.96 42.56,53.1 U:U1.25 | P:R10.1 v29.34,73.03 | P:R3.1 v23.11,75.44 | v23.11,75.44 | P:C1.2 v17.01,75.56 v17.02,75.56 | P:C3.2 v13.96,75.43 v13.97,75.44 | P:C4.2 5.29,74.34 v5.21,74.42 | P:C2.2 v13.34,66.55 | P:C7.2 v12.19,63.37 | UC:U1.15 v37.72,24.38 | E:U1.8 26.1,29.02 v26.04,29.08
  Top 0.36: U:R6.2 v40.89,69.47 | P:R1.1 v30.1,67.56 | UC:C6.2 v41.4,39.12 | P:U2.9 P:U2.9_2
  Top 0.508: P:J1.2 34.56,68.07
  Top 1.016: P:J1.2 34.04,68.2 33.53,68.71 34.18,68.71 P:J1.2 | P:J1.2 34.05,67.56 33.15,67.56
  other vias: 33.02,68.07 33.66,68.07
  pour Bottom: 0.25,0 57.91,0 58.04,0.13 58.04,76.96 0,76.96 0,0
  pour Top: 32.89,68.96 34.67,68.96 34.67,67.31 32.89,67.31
N$1  (via drill 0.35)
  other vias: 20.19,65.66
N$2  (via drill 0.35)
  other vias: 21.46,65.66
N$3  (via drill 0.35)
  other vias: 21.46,64.64
N$4  (via drill 0.35)
  other vias: 20.19,64.64
N$5  (via drill 0.35)
  other vias: 20.83,65.15
N$6  (via drill 0.35 pad 0.95)
  other vias: 47.37,21.46
N$7  (via drill 0.35 pad 0.95)
  other vias: 51.05,21.46
N$8  (via drill 0.35 pad 0.95)
  other vias: 49.15,21.46
N$9  (via drill 0.35 pad 0.95)
  other vias: 49.15,17.91
N$10  (via drill 0.35 pad 0.95)
  other vias: 51.05,17.91
N$11  (via drill 0.35 pad 0.95)
  other vias: 47.37,17.91
P:3V3_PG
  Top 0.203: P:U2.6 3.3,51.43 3.43,51.56 3.94,51.56 4.95,52.57 4.95,55.08 6.58,56.71 P:R11.1 6.58,62.21 P:TP2.TP
P:BQ_PG
  Top 0.203: P:U1.3 20.58,62.36 19.68,61.47 16.51,61.47 16.38,61.47 14.73,59.82 P:LED3.1
P:BQ_REGN  (via drill 0.35)
  Top 0.203: P:U1.22 18.29,64.77 17.78,65.28 17.78,66.29 | 17.53,66.55 17.78,66.29 | P:C2.1 17.53,66.55 | 17.53,66.55 17.65,66.55 17.78,66.67 | 17.78,66.67 v18.03,66.93 | P:R2.2 18.84,74.34 17.91,73.41 15.75,73.41 15.37,73.03 15.37,71.75 16.89,70.23 v16.89,69.22 | 17.78,66.29 17.78,66.67
  Bottom 0.23: v18.03,66.93 16.89,68.07 v16.89,69.22
P:BQ_STAT
  Top 0.203: P:LED1.1 19.16,59.94 19.94,59.94 21.08,61.08 P:U1.4
P:N$1
  Top 0.203: 22.35,69.47 22.35,70.1 22.41,70.16
  Top 0.254: 22.08,67.84 P:U1.13 P:U1.14
  Top 0.36: P:Q2.2 22.86,69.71 | 22.86,69.71 22.59,69.71 22.35,69.47 22.08,69.19 22.08,67.84 | P:C1.1 17.01,71.38 17.27,71.12 21.45,71.12 22.41,70.16 22.86,69.71
P:N$2  (via drill 0.35)
  Top 0.203: P:R2.1 P:R3.2 23.11,71.5 v24,70.61 | v24,68.96 24,66.29 23.48,65.77 P:U1.11 P:U1.12
  Bottom 0.23: v24,68.96 v24,70.61
P:N$3
  Top 0.203: P:L1.1 13.89,70.57 16.51,67.94 18.16,67.94 18.89,67.21 P:U1.19 P:U1.20 P:U1.21
P:N$4
  Top 0.36: P:J1.1 36.69,70.12 36.32,70.48 28.48,70.48 P:Q2.3
P:N$5
  Top 0.203: P:U1.23 18.03,64.26 17.14,63.37 P:C7.1
P:N$6
  Top 0.203: P:U1.10 23.87,65.27 26.16,67.56 P:R1.2
P:N$7
  Top 0.203: P:LED3.2 11.82,55.77 P:R8.1
P:N$8
  Top 0.203: P:U1.15 P:U1.16 20.58,68.07 19.94,68.71 16.38,68.71 14.1,70.99 14.1,72.31 P:C3.1 12.24,72.44 P:L1.2 8.2,72.44 P:C4.1 4.7,72.44 1.27,69.01 1.27,51.18 1.68,50.77 | P:U2.8 1.68,50.77 | 1.68,50.77 1.68,49.12 2,48.8 P:U2.1
P:N$9
  Top 0.36: P:Q2.1 26.51,72.87 P:R10.2
P:N$10
  Top 0.203: P:IC6.5 16.4,40.15 14.86,38.61 13.77,38.61 P:R7.1 13.71,36.33 14.99,35.05 16.19,35.05 16.38,34.86 | P:R6.2 16.38,34.86 | 16.38,34.86 18.03,34.86 18.92,35.75 20.62,35.75 21.51,34.86 P:C12.1
P:N$11
  Top 0.203: P:L4.1 2.75,50.82 P:U2.7
P:N$12
  Top 0.203: P:R12.1 15.61,59.04 16.38,59.82 P:LED1.2
P:N$13
  Top 0.203: P:D3.A 27.18,35.54 | 27.18,35.54 30.59,35.54 P:L2.2 | P:IC6.6 22.42,39.3 26.18,35.54 27.18,35.54
P:N$14
  Top 0.203: P:C13.2 29.21,49.53 28.53,50.21 P:D2.A P:D1.C
P:N$15
  Top 0.203: P:R9.1 4.45,41.78 5,41.23 P:Q3.3
  Top 0.36: P:R9.1 5.9,43.12 6.22,42.8 7.37,42.8 7.62,43.05 7.62,44.58 7.35,44.85 P:Q1.1
P:N$16
  Top 0.203: P:IC6.10 23.23,42.15 23.5,42.42 23.5,43.43 24.89,44.83 P:L3.2 30.99,45.97 30.35,46.61 P:C13.1 | P:C13.1
P:N$17
  Top 0.203: P:IC6.1 15.22,42.15 14.83,41.75 P:R5.2 | P:R4.1 P:C11.2
  Top 0.36: P:IC6.1 18.22,45.4 19.44,46.62 P:C11.2
P:N$19
  Top 0.203: P:R16.1 9.54,46.5 9.53,46.48 9.53,45.97 10.79,44.7 P:C22.1
P:N$20
  Top 0.203: P:R15.1 P:C21.1
P:N$21
  Top 0.36: P:R14.1 P:C20.1
P:N$22
  Top 0.203: P:C19.1 P:R13.1
RTS
  Top 0.203: U:U1.3 53.84,52.45 53.91,52.51 U:TP3.TP 54.86,51.88 54.86,47.89 55.75,47 55.75,39.5 55.23,38.98 UC:R8.2 54.42,39.13 UC:U2.4
SHR_CLK
  Top 0.203: UC:U1.8 47.8,29.28 46.95,30.14 38.09,30.14 37.23,30.99 33.66,30.99 33.15,30.48 E:U1.3
SHR_DATA
  Top 0.203: UC:U1.9 46.53,29.03 45.97,29.59 37.97,29.59 37.21,30.35 34.67,30.35 34.42,30.1 E:U1.2
SHR_STR  (via drill 0.35)
  Top 0.203: v35.56,27.43 35.56,28.89 E:U1.1 | UC:U1.27 42.73,11.38 42.29,11.81 35.56,11.81 v35.31,12.06 | v35.05,14.99 35.05,21.84 v35.31,22.1
  Bottom 0.203: v35.31,12.06 35.05,12.32 v35.05,14.99 | v35.31,22.1 35.31,27.18 v35.56,27.43
U:FT232_RX_IND
  Top 0.36: U:LED2.1 39.95,53.03 41.97,55.05 U:U1.22
U:FT232_TX_IND
  Top 0.36: U:LED1.1 36.88,53.03 38.1,51.82 40.13,51.82 42.71,54.4 U:U1.23
U:N$1
  Top 0.36: U:R1.1 35.18,54.66 U:LED1.2
U:N$2
  Top 0.36: U:LED2.2 U:R4.1
U:N$3
  Top 0.36: U:R2.1 46.28,67.49 49.18,70.39 U:J1.1
U:N$4  (via drill 0.35)
  Top 0.36: U:U1.17 v44.96,58.29 | v46.35,56.9 46.35,56.01 49.27,53.1 U:U1.4 52.72,53.1 52.96,53.34 U:C1.1
  Bottom 0.36: v44.96,58.29 v46.35,56.9
U:N$7
  Top 0.36: U:J1.5 46.58,70.78 45.27,69.47 U:R6.1
U:USBD1_N
  Top 0.203: U:J1.2 48.53,70.75 44.52,66.75 arc-90 44.16,66.75 43.62,67.29 arc90 43.25,67.29 43.05,67.08 arc90 43.05,66.72 43.59,66.18 arc-90 43.59,65.81 U:R3.1
U:USBD1_P
  Top 0.203: U:J1.3 47.88,70.87 45.34,68.33 43.18,68.33 40.89,66.04 U:R5.1
U:USBD2_N
  Top 0.203: U:U1.16 44.98,58.95 45.47,59.44 45.47,60.07 44.96,60.58 44.58,60.58 43.59,61.57 U:R3.2 43.27,62.87 42.55,62.87 41.91,63.5 38.61,63.5 37.76,64.35 U:D1.3
U:USBD2_P
  Top 0.203: 41.34,59.63 40.89,60.07 40.89,60.81 arc90 40.63,61.07 40.56,61.07 arc-90 40.3,61.33 40.3,61.45 arc-90 40.56,61.72 40.63,61.72 arc90 40.89,61.98 U:R5.2 40.74,62.39 40.01,62.39 arc-90 39.74,62.65 39.74,62.84 arc90 39.48,63.1 39.4,63.1 arc90 39.14,62.84 39.14,61.94 arc-90 38.88,61.68 38.8,61.68 arc-90 38.54,61.94 38.54,62.84 arc90 38.28,63.1 38.2,63.1 arc90 37.94,62.84 37.94,62.65 arc-90 37.68,62.39 U:D1.2 | 41.4,59.56 41.34,59.63 | 41.34,59.63 43.59,59.63 U:U1.15
UC:ESP_EN
  Top 0.203: UC:U2.3 51.67,42.14 50.93,41.4 50.93,40.51 49.6,39.18 UC:R9.2 UC:TP1.TP 48.77,36.58 52.96,36.58 53.34,36.2 53.34,30.61 54.16,29.79 54.16,28.9 UC:U1.3
UC:ESP_IO0  (via drill 0.35)
  Top 0.203: UC:U2.6 54.02,43.44 53.62,43.04 53.62,40.07 53.38,39.83 53.38,37.3 54.27,36.4 UC:R10.2 54.99,35.43 v55.63,34.8 | UC:TP2.TP v38.99,10.16 40.18,10.16 UC:U1.25 | v55.75,24.26 55.75,17.78 55.05,17.08 53.15,17.08 48.03,11.97 44.38,11.97 43.67,12.67 v41.53,12.67
  Bottom 0.203: v55.75,24.26 55.75,34.67 v55.63,34.8 | v38.99,10.16 41.5,12.67 v41.53,12.67
UC:ESP_TCK  (via drill 0.35)
  Top 0.203: UC:U1.16 41.91,23.11 43.43,21.59 v43.43,13.34
  Bottom 0.203: v43.43,13.34 43.43,6.92 UC:JTAG.3
UC:ESP_TDI  (via drill 0.35)
  Top 0.203: v41.78,24 44.07,21.72 v44.07,12.95 | UC:U1.14 40.19,25.98 40.36,25.8 40.87,25.8 v40.89,25.78
  Bottom 0.203: v41.78,24 41.78,24.89 v40.89,25.78 | UC:JTAG.2 44.07,5.02 v44.07,12.95
UC:ESP_TDO  (via drill 0.35)
  Top 0.203: v37.47,14.1 37.59,14.22 UC:U1.23
  Bottom 0.203: UC:JTAG.4 35.94,4 35.94,12.57 v37.47,14.1
UC:ESP_TMS  (via drill 0.35)
  Top 0.203: v42.8,23.88 44.7,21.97 v44.7,12.45 | v41.66,25.78 41.45,25.98 UC:U1.13
  Bottom 0.203: v42.8,23.88 42.8,24.64 v41.66,25.78 | v44.7,12.45 44.7,3.11 UC:JTAG.1
UC:N$1
  Top 0.203: UC:R3.1 54.4,45.17 55.24,44.32 55.24,43.05 54.98,42.79 UC:U2.5
UC:N$2  (via drill 0.35)
  Top 0.203: UC:R13.2 23.11,53.8 23.11,52.83 24,51.94 v25.91,51.94 | v28.7,52.01 28.76,52.07 30.73,52.07 31.43,51.37 35.45,51.37 36.45,50.38 36.45,33.27 38.61,31.11 48.39,31.11 50.34,29.16 UC:U1.6
  Bottom 0.23: v25.91,51.94 25.91,52.01 v28.7,52.01
UC:N$3
  Top 0.203: UC:R5.2 26.83,52.43 28.25,51.01 35.05,51.01 35.94,50.12 35.94,33.02 38.35,30.61 47.5,30.61 49.08,29.03 UC:U1.7
UC:N$4
  Top 0.203: UC:U2.2 52.54,42.82 53.07,42.82 53.27,42.62 53.27,41.91 52.58,41.23 52.58,39.18 UC:R8.1
UC:N$5
  Top 0.203: UC:R1.1 40.51,48.64 | 40.51,48.64 41.27,47.88 41.15,47.88 38.24,44.97 UC:S1.2 38.23,43.73 38.23,42.93 38.86,42.29 UC:R6.1 | 40.51,48.64 39.5,49.66 38.31,49.66 UC:S1.1
UC:N$6
  Top 0.203: 40.51,36.2 38.24,38.47 UC:S2.1 | 40.51,36.2 40.77,35.94 | UC:R7.1 UC:R2.1 40.77,35.94 | 40.77,35.94 40.51,35.69 | 40.51,35.69 39.04,34.21 UC:S2.2 | 40.51,35.69 40.51,36.2
UC:N$7
  Top 0.203: UC:R7.2 44.89,32.26 52.38,32.26 UC:C4.1 UC:R10.1
UC:N$9
  Top 0.203: UC:C3.1 UC:R6.2 45.21,42.29 46.42,41.08 UC:R9.1

## Text on the board
tPlace: - | + | RESET | BOOT | GND | TDO | TCK | TDI | TMS | GND | RX | TX
bPlace: Spot Check | rev. 3 / 02/22 | S e c o n d / S t r i n g / S t u d i o s